# Altium PCB RF315.PcbDoc (part 1 of 3)
Units mm, origin at the board's own origin, x right, y up, seen from the top; angles counter-clockwise.
Board outline 104 x 96 mm, 2 copper layers (Top Layer, Bottom Layer); 249 components, 20 nets, 1048 pads, 153 vias.
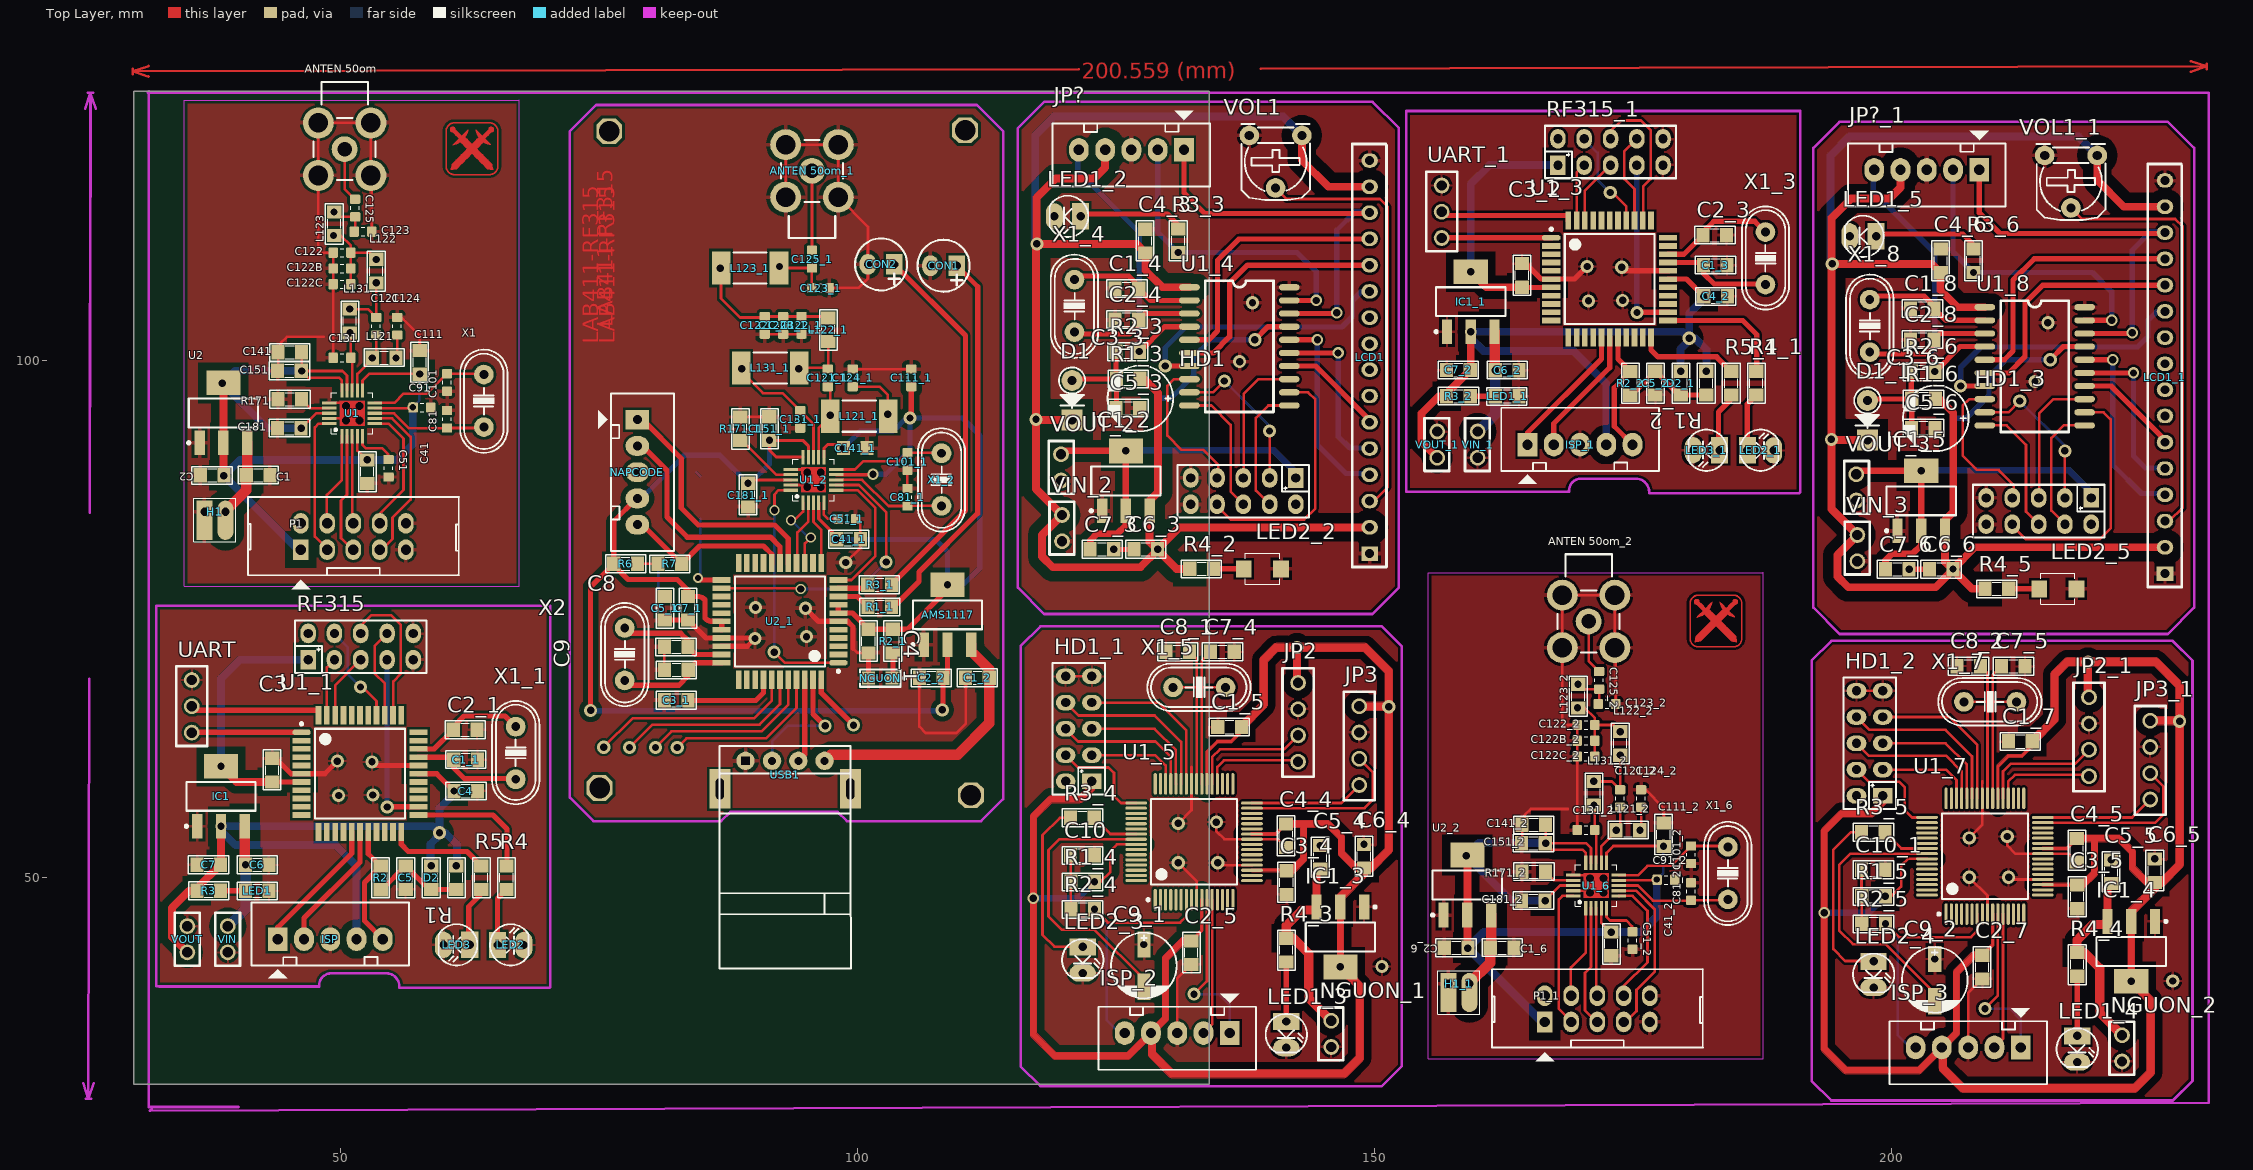
[diagram p0: Top Layer view]
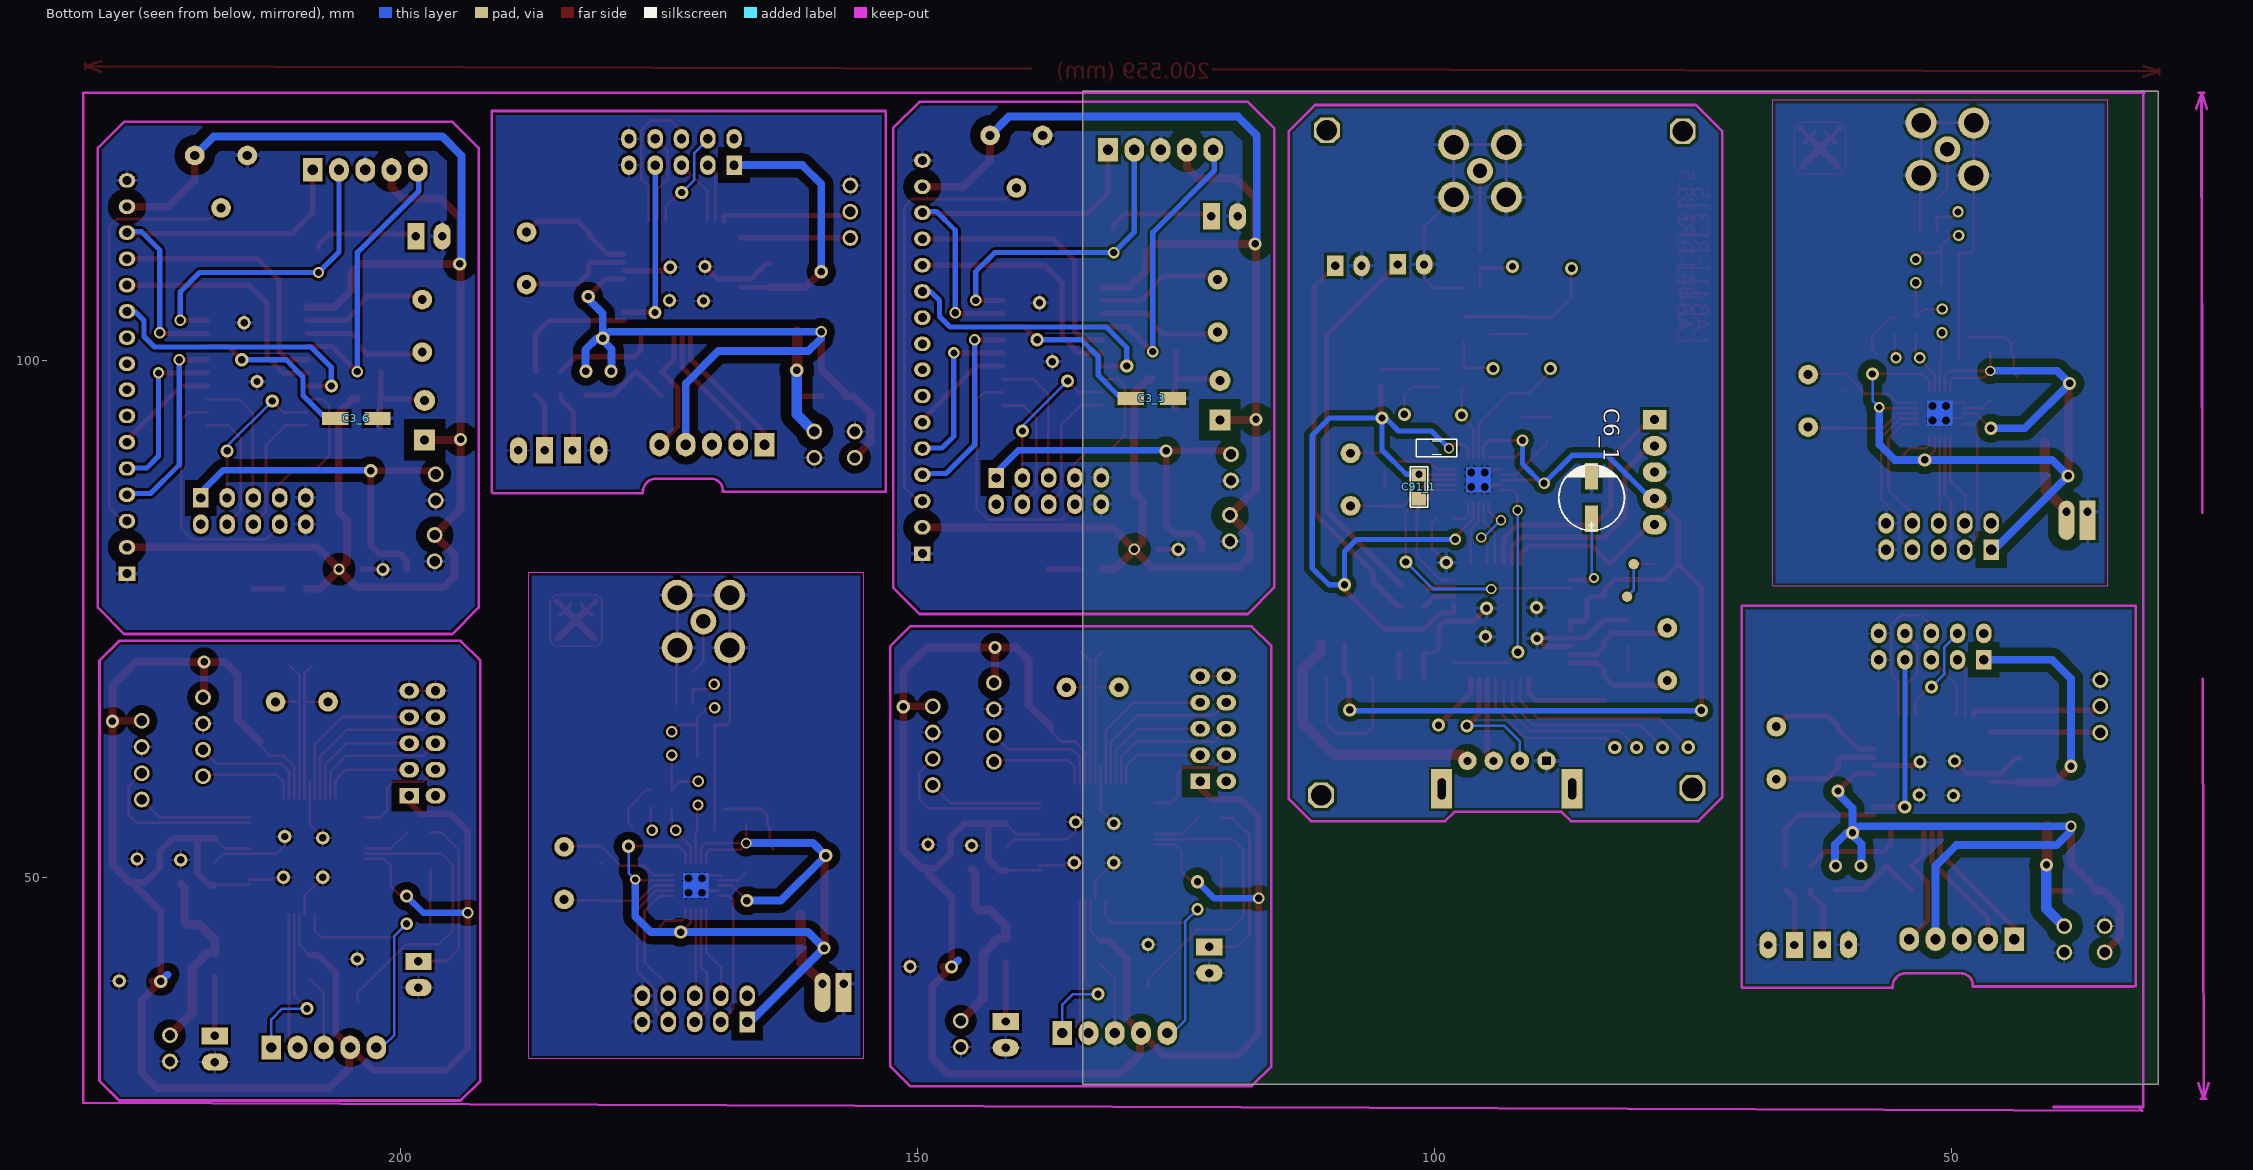
[diagram p1: Bottom Layer view, seen from below]

## Layer stack, top to bottom
Top Layer: signal copper 0.0356
Dielectric: dielectric 0.32, FR-4, Dk 4.8
Bottom Layer: signal copper 0.0356

## Board outline
30,30 30,126 134,126 134,30

## Design rules (kind name [scope] priority, off if disabled: settings)
Clearance 5 [InNet('+5V')] p1: gap=1.016
Clearance 3.3 [InNet('+3.3V')] p2: gap=0.762
Clearance [All] p3: gap=0.254
ComponentClearance [All] p1: gap=0.051 collisioncheckmode=3 verticalgap=0.051 showdistances=FALSE
PolygonConnect [All] p1: connectstyle=Relief reliefconductorwidth=0.381 reliefentries=4 polygonreliefangle="90 Angle" airgapwidth=0.254
RoutingVias [All] p1: holewidth=0.711 width=1.27 viastyle="Through Hole" minholewidth=0.711 minwidth=1.27 maxholewidth=0.711 maxwidth=1.27
ShortCircuit [All] p1: allowed=TRUE
SilkToSilkClearance [All] p1: silktosilkclearance=0.051
SilkToSolderMaskClearance [IsPad] p1: minsilkscreentomaskgap=0 clearancetoexposedcopper=TRUE
SolderMaskExpansion [All] p1: expansion=0.102
Width 5v [InNet('+5V')] p1: maxlimit=1.016 minlimit=1.016 preferedwidth=1.016
Width 3.3v [InNet('+3.3V')] p2: maxlimit=0.254 minlimit=0.254 preferedwidth=0.254
Width [All] p3: maxlimit=0.254 minlimit=0.254 preferedwidth=0.254
24 further rules are at their usual default settings.

## Components (designator, comment, footprint, x,y, rotation, side; value= is the part's Value field where it differs from the comment)
AMS1117 "LM317" SOT223-4N 108.687,75.387 r90 top
"ANTEN 50om" "Header 2" MCX5.08-H5 50.383,126.912 r270 top
"ANTEN 50om_1" "Header 2" MCX5.08-H5 95.58,111.811 r90 top (schematic designator "ANTEN 50om")
"ANTEN 50om_2" "Header 2" MCX5.08-H5 170.677,81.243 r270 top (schematic designator "ANTEN 50om")
C1 "104" SM-0805#1 42.012,88.875 r180 top
C1_1 "103" SM-0805#1 62.078,61.366 r180 top (schematic designator C1)
C1_2 "104" SM-0805#1 111.582,69.317 r0 top (schematic designator C1)
C1_3 "103" SM-0805#1 182.931,109.195 r180 top (schematic designator C1)
C1_4 "103" SM-0805#1 126.035,106.934 r180 top (schematic designator C1)
C1_5 "103" SM-0805#1 135.954,64.536 r0 top (schematic designator C1)
C1_6 "104" SM-0805#1 162.306,43.205 r180 top (schematic designator C1)
C1_7 "103" SM-0805#1 212.434,63.139 r0 top (schematic designator C1)
C1_8 "103" SM-0805#1 202.946,105.004 r180 top (schematic designator C1)
C2 "104" SM-0805#1 37.567,88.875 r0 top
C2_1 "103" SM-0805#1 62.027,64.262 r180 top (schematic designator C2)
C2_2 "104" SM-0805#1 107.112,69.291 r0 top (schematic designator C2)
C2_3 "103" SM-0805#1 182.88,112.09 r180 top (schematic designator C2)
C2_4 "103" SM-0805#1 126.035,103.937 r180 top (schematic designator C2)
C2_5 "103" SM-0805#1 132.271,42.717 r270 top (schematic designator C2)
C2_6 "104" SM-0805#1 157.861,43.205 r0 top (schematic designator C2)
C2_7 "103" SM-0805#1 208.751,41.32 r270 top (schematic designator C2)
C2_8 "103" SM-0805#1 202.946,102.006 r180 top (schematic designator C2)
C3 "103" SM-0805#1 43.383,60.376 r270 top
C3_1 "103" SM-0805#1 82.448,67.107 r180 top (schematic designator C3)
C3_2 "103" SM-0805#1 164.236,108.204 r270 top (schematic designator C3)
C3_3 "100uF/35V" CP1/2.5_SM#1 128.6,96.317 r180 top (schematic designator C3)
C3_4 "103" SM-0805#1 141.466,49.499 r270 top (schematic designator C3)
C3_5 "103" SM-0805#1 217.945,48.102 r270 top (schematic designator C3)
C3_6 "100uF/35V" CP1/2.5_SM#1 205.511,94.386 r180 top (schematic designator C3)
C4 "103" SM-0805#1 62.103,58.344 r180 top
C4_1 "103" SM-0805#1 101.041,72.847 r270 top (schematic designator C4)
C4_2 "103" SM-0805#1 182.956,106.172 r180 top (schematic designator C4)
C4_3 "103" SM-0805#1 127.813,111.531 r270 top (schematic designator C4)
C4_4 "103" SM-0805#1 141.415,54.02 r90 top (schematic designator C4)
C4_5 "103" SM-0805#1 217.895,52.623 r90 top (schematic designator C4)
C4_6 "103" SM-0805#1 204.724,109.601 r270 top (schematic designator C4)
C5 "103" SM-0805#1 56.286,49.962 r90 top
C5_1 "103" SM-0805#1 81.356,76.022 r90 top (schematic designator C5)
C5_2 "103" SM-0805#1 177.14,97.79 r90 top (schematic designator C5)
C5_3 "103" SM-0805#1 126.136,95.377 r180 top (schematic designator C5)
C5_4 "103" SM-0805#1 144.743,51.938 r270 top (schematic designator C5)
C5_5 "103" SM-0805#1 221.222,50.541 r270 top (schematic designator C5)
C5_6 "103" SM-0805#1 203.048,93.447 r180 top (schematic designator C5)
C6 "103" SM-0805#1 41.935,51.206 r180 top
C6_1 "100uF/35V" CP1/2.5_SM#2 84.785,85.446 r90 bottom (schematic designator C6)
C6_2 "103" SM-0805#1 162.789,99.035 r180 top (schematic designator C6)
C6_3 "103" SM-0805#1 127.864,81.737 r0 top (schematic designator C6)
C6_4 "103" SM-0805#1 148.959,52.039 r270 top (schematic designator C6)
C6_5 "103" SM-0805#1 225.438,50.642 r270 top (schematic designator C6)
C6_6 "103" SM-0805#1 204.775,79.807 r0 top (schematic designator C6)
C7 "103" SM-0805#1 37.236,51.232 r0 top
C7_1 "103" SM-0805#1 83.591,76.022 r90 top (schematic designator C7)
C7_2 "103" SM-0805#1 158.09,99.06 r0 top (schematic designator C7)
C7_3 "103" SM-0805#1 123.622,81.712 r180 top (schematic designator C7)
C7_4 "103" SM-0805#1 135.268,71.8 r180 top (schematic designator C7)
C7_5 "103" SM-0805#1 211.748,70.403 r180 top (schematic designator C7)
C7_6 "103" SM-0805#1 200.533,79.781 r180 top (schematic designator C7)
C8 "33pF" SM-0805#1 82.474,70.079 r0 top
C8_1 "103" SM-0805#1 130.95,71.826 r0 top (schematic designator C8)
C8_2 "103" SM-0805#1 207.43,70.429 r0 top (schematic designator C8)
C9 "33pF" SM-0805#1 82.448,72.288 r0 top
C9_1 "103" CP1/2.5_SM#2 127.674,42.743 r270 top (schematic designator C9)
C9_2 "103" CP1/2.5_SM#2 204.153,41.346 r270 top (schematic designator C9)
C10 "103" SM-0805#1 121.73,52.115 r180 top
C10_1 "103" SM-0805#1 198.21,50.718 r180 top (schematic designator C10)
C41 "104" SM-0805#1 52.578,89.23 r90 top
C41_1 "104" SM-0805#1 99.111,82.677 r180 top (schematic designator C41)
C41_2 "104" SM-0805#1 172.872,43.561 r90 top (schematic designator C41)
C51 "104" 0603ESDA#1 54.635,89.56 r90 top
C51_1 "104" 0603ESDA#2 98.958,84.658 r180 top (schematic designator C51)
C51_2 "104" 0603ESDA#1 174.93,43.891 r90 top (schematic designator C51)
C81 "27pF" 0603ESDA#1 60.289,94.299 r270 top
C81_1 "27pF" 0603ESDA#2 104.808,86.756 r270 top (schematic designator C81)
C81_2 "27pF" 0603ESDA#1 180.583,48.629 r270 top (schematic designator C81)
C91 "103" 0603ESDA#2 57.861,95.428 r180 top
C91_1 "103" SM-0805#1 101.498,87.757 r90 bottom (schematic designator C91)
C91_2 "103" 0603ESDA#2 178.156,49.759 r180 top (schematic designator C91)
C101 "27pF" 0603ESDA#1 60.289,97.855 r90 top
C101_1 "27pF" 0603ESDA#2 104.808,90.21 r90 top (schematic designator C101)
C101_2 "27pF" 0603ESDA#1 180.583,52.185 r90 top (schematic designator C101)
C111 "220pF" SM-0805#1 57.633,99.797 r270 top
C111_1 "220pF" 0603ESDA#2 105.181,98.298 r270 top (schematic designator C111)
C111_2 "220pF" SM-0805#1 177.927,54.127 r270 top (schematic designator C111)
C121 "6.8pF" 0603ESDA#1 53.431,103.29 r270 top
C121_1 "6.8pF" 0603ESDA#2 97.104,98.298 r270 top (schematic designator C121)
C121_2 "6.8pF" 0603ESDA#1 173.725,57.621 r270 top (schematic designator C121)
C122 "12pF" 0603ESDA#1 50.129,110.402 r180 top
C122_1 "12pF" 0603ESDA#2 94.564,103.378 r270 top (schematic designator C122)
C122_2 "12pF" 0603ESDA#1 170.423,64.733 r180 top (schematic designator C122)
C122B "12pF" 0603ESDA#1 50.129,108.878 r180 top
C122B_1 "12pF" 0603ESDA#2 92.786,103.378 r270 top (schematic designator C122B)
C122B_2 "12pF" 0603ESDA#1 170.423,63.209 r180 top (schematic designator C122B)
C122C "12pF" 0603ESDA#1 50.129,107.354 r180 top
C122C_1 "12pF" 0603ESDA#2 91.008,103.378 r270 top (schematic designator C122C)
C122C_2 "12pF" 0603ESDA#1 170.423,61.685 r180 top (schematic designator C122C)
C123 "6.8pF" 0603ESDA#1 52.161,112.434 r0 top
C123_1 "6.8pF" 0603ESDA#2 96.418,106.985 r0 top (schematic designator C123)
C123_2 "6.8pF" 0603ESDA#1 172.455,66.765 r0 top (schematic designator C123)
C124 "220pF" 0603ESDA#1 55.463,103.29 r270 top
C124_1 "220pF" 0603ESDA#2 99.517,98.298 r270 top (schematic designator C124)
C124_2 "220pF" 0603ESDA#1 175.757,57.621 r270 top (schematic designator C124)
C125 "220pF" 0603ESDA#1 51.399,114.72 r90 top
C125_1 "220pF" 0603ESDA#2 95.58,109.779 r90 top (schematic designator C125)
C125_2 "220pF" 0603ESDA#1 171.693,69.051 r90 top (schematic designator C125)
C131 "6.8pF" 0603ESDA#1 50.129,100.242 r180 top
C131_1 "27" 0603ESDA#2 94.437,94.285 r270 top (schematic designator C131)
C131_2 "6.8pF" 0603ESDA#1 170.423,54.573 r180 top (schematic designator C131)
C141 "103" SM-0805#1 45.085,100.762 r0 top
C141_1 "103" SM-0805#2 99.771,91.516 r180 bottom (schematic designator C141)
C141_2 "103" SM-0805#1 165.379,55.093 r0 top (schematic designator C141)
C151 "220pF" SM-0805#1 45.049,98.972 r180 top
C151_1 "220pF" SM-0805#1 91.465,93.396 r90 top (schematic designator C151)
C151_2 "220pF" SM-0805#1 165.343,53.303 r180 top (schematic designator C151)
C181 "220pF" SM-0805#1 45.034,93.421 r180 top
C181_1 "27pF" SM-0805#1 89.408,86.97 r270 top (schematic designator C181)
C181_2 "220pF" SM-0805#1 165.329,47.752 r180 top (schematic designator C181)
CON1 "LED" LED3mm 108.306,109.144 r180 top
CON2 "LED" LED3mm 102.26,109.271 r180 top
D1 "1N4007" D1AN 120.726,96.139 r90 top
D1_1 "1N4007" D1AN 197.637,94.209 r90 top (schematic designator D1)
D2 "1N4007" SM-0805#1 58.75,49.962 r90 top
D2_1 "1N4007" SM-0805#1 179.603,97.79 r90 top (schematic designator D2)
H1 "Header 2" HDR1X2 36.576,85.369 r0 top
H1_1 "Header 2" HDR1X2 156.87,39.7 r0 top (schematic designator H1)
HD1 "Header 5x2" HED2X5_cen 142.367,88.621 r180 top
HD1_1 "Header 5x2" HED2X5_CEN 122.645,59.278 r90 top (schematic designator HD1)
HD1_2 "Header 5x2" HED2X5_CEN 199.124,57.881 r90 top (schematic designator HD1)
HD1_3 "Header 5x2" HED2X5_cen 219.278,86.69 r180 top (schematic designator HD1)
IC1 "LM1117" SOT223-4N 38.43,57.836 r90 top
IC1_1 "LM1117" SOT223-4N 159.283,105.664 r90 top (schematic designator IC1)
IC1_2 "LM1117" SOT223-4N 125.933,88.341 r90 top (schematic designator IC1)
IC1_3 "LM1117" SOT223-4N 146.673,44.241 r270 top (schematic designator IC1)
IC1_4 "LM1117" SOT223-4N 223.152,42.844 r270 top (schematic designator IC1)
IC1_5 "LM1117" SOT223-4N 202.844,86.411 r90 top (schematic designator IC1)
ISP "JP5" CON5#1 43.917,44.018 r0 top
ISP_1 "JP5" CON5#1 164.77,91.846 r0 top (schematic designator ISP)
ISP_2 "JP5" CON5#1 135.98,34.945 r180 top (schematic designator ISP)
ISP_3 "JP5" CON5#1 212.459,33.548 r180 top (schematic designator ISP)
JP2 "JP4" CON4 142.584,63.723 r90 top
JP2_1 "JP4" CON4 219.063,62.326 r90 top (schematic designator JP2)
JP3 "JP4" CON4 148.502,61.463 r90 top
JP3_1 "JP4" CON4 224.981,60.066 r90 top (schematic designator JP3)
JP? "JP5" CON5#1 131.547,120.345 r180 top
JP?_1 "JP5" CON5#1 208.458,118.415 r180 top (schematic designator JP?)
L121 "33nH" SM-0805#1 54.193,100.242 r180 top
L121_1 "27nH" SM-2512 100.152,94.59 r180 top (schematic designator L121)
L121_2 "33nH" SM-0805#1 174.487,54.573 r180 top (schematic designator L121)
L122 "18nH" SM-0805#1 53.431,108.624 r90 top
L122_1 "22nH" SM-0805#1 97.155,102.946 r90 top (schematic designator L122)
L122_2 "18nH" SM-0805#1 173.725,62.955 r90 top (schematic designator L122)
L123 "33nH" SM-0805#1 49.367,113.196 r90 top
L123_1 "27nH" SM-2512 89.586,108.915 r0 top (schematic designator L123)
L123_2 "33nH" SM-0805#1 169.661,67.527 r90 top (schematic designator L123)
L131 "33nH" SM-0805#1 50.891,103.798 r90 top
L131_1 "27nH" SM-2512 91.542,99.263 r0 top (schematic designator L131)
L131_2 "33nH" SM-0805#1 171.185,58.129 r90 top (schematic designator L131)
LCD1 "LCD16x2A" LCD 149.504,81.305 r90 top
LCD1_1 "LCD16x2A" LCD 226.416,79.375 r90 top (schematic designator LCD1)
LED1 "LED" SM-0805#1 41.935,48.692 r0 top
LED1_1 "LED" SM-0805#1 162.789,96.52 r0 top (schematic designator LED1)
LED1_2 "LED" LED-3 121.564,113.919 r180 top (schematic designator LED1)
LED1_3 "LED" LED-3 141.441,36.063 r270 top (schematic designator LED1)
LED1_4 "LED" LED-3 217.92,34.666 r270 top (schematic designator LED1)
LED1_5 "LED" LED-3 198.476,111.989 r180 top (schematic designator LED1)
LED2 "LED" LED-3 65.176,43.459 r0 top
LED2_1 "LED" LED-3 186.03,91.288 r0 top (schematic designator LED2)
LED2_2 "LED" SM-LED-GEEN 139.141,79.832 r0 top (schematic designator LED2)
LED2_3 "LED" LED-3 121.756,43.276 r270 top (schematic designator LED2)
LED2_4 "LED" LED-3 198.235,41.879 r270 top (schematic designator LED2)
LED2_5 "LED" SM-LED-GEEN 216.052,77.902 r0 top (schematic designator LED2)
LED3 "LED" LED-3 62.484,43.477 r180 top
LED3_1 "LED" LED-3 183.337,91.305 r180 top (schematic designator LED3)
NAPCODE "JP5" CON5#2 78.689,94.259 r270 top
NGUON "LED" LED0805 102.184,69.266 r180 top
NGUON_1 "JP2" CON2 145.784,34.894 r90 top (schematic designator NGUON)
NGUON_2 "JP2" CON2 222.263,33.497 r90 top (schematic designator NGUON)
P1 "Header 6" Hed2X5 46.152,81.686 r0 top
P1_1 "Header 6" Hed2X5 166.446,36.017 r0 top (schematic designator P1)
R1 "1k" SM-0805#1 61.189,49.962 r90 top
R1_1 "220" SM-0805#1 102.133,76.149 r0 top (schematic designator R1)
R1_2 "1k" SM-0805#1 182.042,97.79 r90 top (schematic designator R1)
R1_3 "1k" SM-0805#1 126.162,98.196 r0 top (schematic designator R1)
R1_4 "1k" SM-0805#1 121.756,49.575 r0 top (schematic designator R1)
R1_5 "1k" SM-0805#1 198.235,48.178 r0 top (schematic designator R1)
R1_6 "1k" SM-0805#1 203.073,96.266 r0 top (schematic designator R1)
R2 "1k" SM-0805#1 53.873,49.936 r270 top
R2_1 "220" SM-0805#1 103.403,72.847 r270 top (schematic designator R2)
R2_2 "1k" SM-0805#1 174.727,97.765 r270 top (schematic designator R2)
R2_3 "1k" SM-0805#1 126.111,100.813 r180 top (schematic designator R2)
R2_4 "1k" SM-0805#1 121.756,46.908 r0 top (schematic designator R2)
R2_5 "1k" SM-0805#1 198.235,45.511 r0 top (schematic designator R2)
R2_6 "1k" SM-0805#1 203.022,98.882 r180 top (schematic designator R2)
R3 "1k" SM-0805#1 37.236,48.692 r180 top
R3_1 "220" SM-0805#1 102.108,78.308 r0 top (schematic designator R3)
R3_2 "1k" SM-0805#1 158.09,96.52 r180 top (schematic designator R3)
R3_3 "1k" SM-0805#1 130.988,111.557 r90 top (schematic designator R3)
R3_4 "1k" SM-0805#1 121.73,55.748 r180 top (schematic designator R3)
R3_5 "1k" SM-0805#1 198.21,54.351 r180 top (schematic designator R3)
R3_6 "1k" SM-0805#1 207.899,109.626 r90 top (schematic designator R3)
R4 "1k" SM-0805#1 66.04,49.962 r90 top
R4_1 "1k" SM-0805#1 186.893,97.79 r90 top (schematic designator R4)
R4_2 "1k" SM-0805#1 133.248,79.832 r0 top (schematic designator R4)
R4_3 "1k" SM-0805#1 141.441,42.971 r90 top (schematic designator R4)
R4_4 "1k" SM-0805#1 217.92,41.574 r90 top (schematic designator R4)
R4_5 "1k" SM-0805#1 210.16,77.902 r0 top (schematic designator R4)
R5 "1k" SM-0805#1 63.602,49.962 r90 top
R5_1 "1k" SM-0805#1 184.455,97.79 r90 top (schematic designator R5)
R6 "1k" SM-0805#1 77.546,80.315 r180 top
R7 "1k" SM-0805#1 81.839,80.315 r0 top
R171 "56K" SM-0805#1 45.085,96.215 r180 top
R171_1 "56K" SM-0805#1 88.646,93.37 r90 top (schematic designator R171)
R171_2 "56K" SM-0805#1 165.379,50.546 r180 top (schematic designator R171)
RF315 "Header 5x2" HED2X5_cen 46.863,71.044 r0 top
RF315_1 "Header 5x2" HED2X5_cen 167.716,118.872 r0 top (schematic designator RF315)
U1 "CC1101" QFN-20Pin 49.113,92.876 r90 top
U1_1 "PIC18F46K20T-I/PT" TQFP-PT44_N 51.867,60.02 r0 top (schematic designator U1)
U1_2 "CC1101" QFN-20Pin 93.726,86.436 r90 top (schematic designator U1)
U1_3 "PIC18F46K20T-I/PT" TQFP-PT44_N 172.72,107.848 r0 top (schematic designator U1)
U1_4 "PIC18F14K50-I/P" SOP-20 132.08,107.061 r0 top (schematic designator U1)
U1_5 "PIC24FJ128GA106T-I/PT" TQFP-PT64_M 132.525,53.436 r90 top (schematic designator U1)
U1_6 "CC1101" QFN-20Pin 169.407,47.207 r90 top (schematic designator U1)
U1_7 "PIC24FJ128GA106T-I/PT" TQFP-PT64_M 209.005,52.039 r90 top (schematic designator U1)
U1_8 "PIC18F14K50-I/P" SOP-20 208.991,105.131 r0 top (schematic designator U1)
U2 "LM1117" SOT223-4N 38.659,94.92 r90 top
U2_1 "PIC18F45J50-I/ML" PIC18F45J50SMD 92.481,74.752 r180 top (schematic designator U2)
U2_2 "LM1117" SOT223-4N 158.953,49.251 r90 top (schematic designator U2)
UART "JP3" CON3 35.611,66.497 r90 top
UART_1 "JP3" CON3 156.464,114.325 r90 top (schematic designator UART)
USB1 "USB-S" USB-A 96.799,61.265 r180 top
VIN "JP2" CON2 39.091,44.044 r90 top
VIN_1 "JP2" CON2 159.944,91.872 r90 top (schematic designator VIN)
VIN_2 "JP2" CON2 119.761,83.795 r90 top (schematic designator VIN)
VIN_3 "JP2" CON2 196.672,81.864 r90 top (schematic designator VIN)
VOL1 "50K" VR 142.951,121.742 r180 top
VOL1_1 "50K" VR 219.862,119.812 r180 top (schematic designator VOL1)
VOUT "JP2" CON2 35.179,44.044 r90 top
VOUT_1 "JP2" CON2 156.032,91.872 r90 top (schematic designator VOUT)
VOUT_2 "JP2" CON2 119.659,89.611 r270 top (schematic designator VOUT)
VOUT_3 "JP2" CON2 196.571,87.681 r270 top (schematic designator VOUT)
X1 "26Mhz" XT2 63.845,96.077 r90 top
X1_1 "4Mhz" XT2 66.929,62.027 r270 top (schematic designator X1)
X1_2 "26Mhz" XT2 108.102,88.468 r90 top (schematic designator X1)
X1_3 "4Mhz" XT2 187.782,109.855 r270 top (schematic designator X1)
X1_4 "4Mhz" XT2 120.955,105.258 r90 top (schematic designator X1)
X1_5 "32,768 Khz" XT2 133.033,68.371 r0 top (schematic designator X1)
X1_6 "26Mhz" XT2 184.139,50.407 r90 top (schematic designator X1)
X1_7 "32,768 Khz" XT2 209.513,66.974 r0 top (schematic designator X1)
X1_8 "4Mhz" XT2 197.866,103.327 r90 top (schematic designator X1)
X2 "20Mhz" XT2 77.47,71.577 r90 top

## Footprints (in the part's own frame and the unit in brackets; to place one, negate y for a bottom-side part, rotate by r counter-clockwise, add the part's x,y. Pads: shape width x height; smd on the part's side, far side on the other; paste and mask are expansions set on the pad)
0603ESDA#1 [mm] "Chip ESD suppressor, Body 1.6x0.8mm, 0603, IPC Medium Density"
  round 0.254 on Mech14: 0(0,0)
  rrect25% 0.9x1 smd: 1(-0.85,0) 2(0.85,0)
  Top Layer pour cut-out: -0.4,0.6 0.4,0.6 0.4,-0.6 -0.4,-0.6
  silkscreen extent -0.15,-0.41 0.15,0.41, body extent -0.85,-0.45 0.85,0.45, height 0.79
0603ESDA#2 [mm] "Chip ESD suppressor, Body 1.6x0.8mm, 0603, IPC Medium Density"
  round 0.254 on Mech15: 0(0,0)
  rrect25% 0.9x1 smd: 1(-0.85,0) 2(0.85,0)
  Top Layer pour cut-out: -0.65,0.5 -0.45,0.7 0.45,0.7 0.65,0.5 0.65,-0.5 0.45,-0.7 -0.45,-0.7 -0.65,-0.5
  silkscreen extent -0.15,-0.41 0.15,0.41, body extent -0.85,-0.45 0.85,0.45, height 0.79
CON2 [mm] "2-Pin Connector; pitch 2.54mm"
  round 1.524 hole 1: 1(-1.3,0) 2(1.24,0)
  silkscreen extent -2.58,-1.18 2.52,1.22
CON3 [mm] "3-Pin Connector; pitch 2.54mm"
  round 1.524 hole 1: 1(-2.5,0) 2(0.04,0) 3(2.58,0)
  silkscreen extent -3.8,-1.5 3.9,1.5
CON4 [mil] "4-Pin Connector; pitch 2.54mm"
  round 60 hole 39.37: 1(-100,0) 2(0,0) 3(100,0) 4(200,0)
  silkscreen extent -157,-59 256,59
CON5#1 [mm] "CON5"
  rect 1.905x2.286 hole 1: 1(0,0)
  oval 1.905x2.286 hole 1: 2(2.54,0) 3(5.08,0) 4(7.62,0) 5(10.16,0)
  silkscreen extent -2.54,-3.8 12.7,3.56, body extent -2.63,-2.7 12.83,3.7, height 7
CON5#2 [mm] "CON5"
  rect 1.905x2.286 hole 0.864: 1(0,0)
  oval 1.905x2.286 hole 0.864: 2(2.54,0) 3(5.08,0) 4(7.62,0) 5(10.16,0)
  silkscreen extent -2.54,-3.8 12.7,3.56
CP1/2.5_SM#1 [mil] "Tu hoa SMD 33 >100 uF,50V, 220uF/16V,25V"
  rect 100x50 smd far side: 1(-30,0) 2(131,0)
  silkscreen extent -75,-125 175,125
CP1/2.5_SM#2 [mil] "Tu hoa SMD 33 >100 uF,50V, 220uF/16V,25V"
  rect 100x50 smd: 1(-30,0) 2(131,0)
  silkscreen extent -75,-125 175,125
D1AN [mil] "Diode 1A, W 100mil, L 150mil"
  round 80 hole 35: 1(75,0)
  rect 80x80 hole 35: 2(-75,0)
  silkscreen extent -30,-50 125,50, body extent -64,-50 104,55, height 252
HDR1X2 [mil] "Connector; Header; 2 Position"
  rect 60x150 hole 32 copper offset 0,-33: 1(10,0)
  oval 60x150 hole 32 copper offset 0,-33: 2(90,0)
  silkscreen extent -30,-115 130,50
Hed2X5 [mm] "Header 10x2,20 pin, connecter"
  rect 1.5x2 hole 1: 1(0,0)
  oval 1.5x2 hole 1: 2(0,2.54) 3(2.54,0) 4(2.54,2.54) 5(5.08,0) 6(5.08,2.54) 7(7.62,0) 8(7.62,2.54) 9(10.16,0) 10(10.16,2.54)
  silkscreen extent -5.1,-3.81 15.29,5.11
HED2X5_cen [mm] "Connector; Header; 5x2 Position"
  rect 1.5x1.9 hole 0.9: 1(0,0)
  oval 1.5x1.9 hole 0.9: 2(2.54,0) 3(5.08,0) 4(7.62,0) 5(10.16,0) 6(0,2.54) 7(2.54,2.54) 8(5.08,2.54) 9(7.62,2.54) 10(10.16,2.54)
  silkscreen extent -1.27,-1.27 11.43,3.81, body extent -1.24,-10.02 11.46,2.86, height 5.02
HED2X5_CEN [mm] "Connector; Header; 5x2 Position"
  rect 1.5x1.9 hole 0.9: 1(0,0)
  oval 1.5x1.9 hole 0.9: 2(2.54,0) 3(5.08,0) 4(7.62,0) 5(10.16,0) 6(0,2.54) 7(2.54,2.54) 8(5.08,2.54) 9(7.62,2.54) 10(10.16,2.54)
  silkscreen extent -1.27,-1.27 11.43,3.81, body extent -1.24,-10.02 11.46,2.86, height 5.02
LCD [mm]
  rect 1.4x1.6 hole 0.85 mask+0: 1(0,0)
  oval 1.4x1.6 hole 0.85 mask+0: 2(2.54,0) 3(5.08,0) 4(7.62,0) 5(10.16,0) 6(12.7,0) 7(15.24,0) 8(17.78,0) 9(20.28,0) 10(22.82,0) 11(25.351,0) 12(27.891,0) 13(30.431,0) 14(32.971,0) 15(35.471,0) 16(38.011,0)
  silkscreen extent -1.3,-1.63 39.61,1.67
LED3mm [mm]
  rect 1.6x2 hole 0.8: 1(-1.27,0)
  oval 1.6x2 hole 0.8: 2(1.27,0)
  silkscreen extent -2.52,-2.51 2.51,2.52, body extent -1.99,-1.5 1.99,1.99, height 5.38
LED0805 [mil] "Chip Resistor; Body 2.0 x 1.3 mm (LxW typ)"
  rect 50x50 smd: 1(-45,0) 2(45,0)
  silkscreen extent -97,-33 77,33, body extent -60,-25 60,25, height 47
LED-3 [mil] "LED 2 PIN, 3ly Only colour"
  rect 65x100 hole 32: 1(0,0)
  oval 65x100 hole 32: 2(100,0)
  silkscreen extent -29,-78 118,79, body extent -29,-75 109,75, height 256
MCX5.08-H5 [mm] "Chan anten"
  round 2.5 hole 1.4: 1(6.5,0)
  round 3 hole 1.9: 2(3.96,2.54) 2(3.96,-2.54) 2(9.04,-2.54) 2(9.04,2.54)
  silkscreen extent 0,-3 9.5,3
PIC18F45J50SMD [mm] "PIC18F45J50SMD"
  oct 1.75x0.55 smd: 1(-5.65,4)
  rect 1.75x0.55 smd: 2(-5.65,3.2) 3(-5.65,2.4) 4(-5.65,1.6) 5(-5.65,0.8) 6(-5.65,0) 7(-5.65,-0.8) 8(-5.65,-1.6) 9(-5.65,-2.4) 10(-5.65,-3.2) 11(-5.65,-4) 23(5.65,-4) 24(5.65,-3.2) 25(5.65,-2.4) 26(5.65,-1.6) 27(5.65,-0.8) 28(5.65,0) 29(5.65,0.8) 30(5.65,1.6) 31(5.65,2.4) 32(5.65,3.2) 33(5.65,4)
  rect 0.55x1.75 smd: 12(-4,-5.65) 13(-3.2,-5.65) 14(-2.4,-5.65) 15(-1.6,-5.65) 16(-0.8,-5.65) 17(0,-5.65) 18(0.8,-5.65) 19(1.6,-5.65) 20(2.4,-5.65) 21(3.2,-5.65) 22(4,-5.65) 34(4,5.65) 35(3.2,5.65) 36(2.4,5.65) 37(1.6,5.65) 38(0.8,5.65) 39(0,5.65) 40(-0.8,5.65) 41(-1.6,5.65) 42(-2.4,5.65) 43(-3.2,5.65) 44(-4,5.65)
  silkscreen extent -5.77,-4.35 4.35,4.95, body extent -5,-5 5,5, height 1.2
QFN-20Pin [mm] "QFN 20pin 4x4mm"
  rect 1.4x0.3 smd paste+0.1 mask+0.1: 1(-0.2,-1) 2(-0.2,-1.5) 3(-0.2,-2) 4(-0.2,-2.5) 5(-0.2,-3) 11(4.2,-3) 12(4.2,-2.5) 13(4.2,-2) 14(4.2,-1.5) 15(4.2,-1)
  rect 0.3x1.4 smd paste+0.1 mask+0.1: 6(1,-4.2) 7(1.5,-4.2) 8(2,-4.2) 9(2.5,-4.2) 10(3,-4.2) 16(3,0.2) 17(2.5,0.2) 18(2,0.2) 19(1.5,0.2) 20(1,0.2)
  round 0 hole 0.762: 21(1.3,-1.4) 21(1.3,-2.7) 21(2.7,-2.7) 21(2.7,-1.4)
  Top Layer region: 0.8,-0.8 3.2,-0.8 3.2,-3.2 0.8,-3.2
  Bottom Layer region: 0.8,-0.8 3.2,-0.8 3.2,-3.2 0.8,-3.2
  Top Overlay keep-out circle w0.254: c0.4,-0.4 r0.1
  silkscreen extent 0,-4 4,0
SM-0805#1 [mil] "Compoment SMD 80x50mil"
  rect 50x55 smd: 1(-45,0) 2(45,0)
  silkscreen extent -77,-34 76,33, body extent -40,-27 40,23, height 24
SM-0805#2 [mil] "Compoment SMD 80x50mil"
  rect 50x55 smd far side: 1(-45,0) 2(45,0)
  silkscreen extent -77,-34 76,33, body extent -40,-27 40,23, height 24
SM-2512 [mm] "Chip Resistor; Body 6.3 x 3.2 mm (LxW typ) - C"
  rect 1.8x3.2 smd: 1(-2.8,0) 2(2.8,0)
  silkscreen extent -1.6,-1.5 1.6,1.5
SM-LED-GEEN [mil] "Compoment SMD 120x60mil"
  rect 60x65 smd: 1(-71,0) 2(71,0)
  silkscreen extent -65,-59 65,59, body extent -63,-32 63,31, height 44
SOP-20 [mm]
  oval 2x0.6 smd: 1(0,0) 2(0,-1.27) 3(0,-2.54) 4(0,-3.81) 5(0,-5.08) 6(0,-6.35) 7(0,-7.62) 8(0,-8.89) 9(0,-10.16) 10(0,-11.43) 11(9.652,-11.43) 12(9.652,-10.16) 13(9.652,-8.89) 14(9.652,-7.62) 15(9.652,-6.35) 16(9.652,-5.08) 17(9.652,-3.81) 18(9.652,-2.54) 19(9.652,-1.27) 20(9.652,0)
  silkscreen extent 1.52,-12.06 8.13,0.64
SOT223-4N [mm] "SOT223, 4-Leads, Body 6.5x3.5mm, Pitch 2.3mm, Lead Span 7mm, IPC Medium Density"
  rect 2.4x1 smd: 1(-2.9,2.3) 2(-2.9,0) 3(-2.9,-2.3)
  rect 2.4x3.3 smd: 4(2.9,0)
  silkscreen extent -3.02,-3.35 1.4,3.47, body extent -3.39,-3.27 3.5,3.23, height 1.72
TQFP-PT44_N [mm] "Thin QFP, 44-Leads, Body 10x10mm, Pitch 0.8mm, IPC Medium Density"
  oct 1.75x0.55 smd: 1(-5.65,4)
  rect 1.75x0.55 smd: 2(-5.65,3.2) 3(-5.65,2.4) 4(-5.65,1.6) 5(-5.65,0.8) 6(-5.65,0) 7(-5.65,-0.8) 8(-5.65,-1.6) 9(-5.65,-2.4) 10(-5.65,-3.2) 11(-5.65,-4) 23(5.65,-4) 24(5.65,-3.2) 25(5.65,-2.4) 26(5.65,-1.6) 27(5.65,-0.8) 28(5.65,0) 29(5.65,0.8) 30(5.65,1.6) 31(5.65,2.4) 32(5.65,3.2) 33(5.65,4)
  rect 0.55x1.75 smd: 12(-4,-5.65) 13(-3.2,-5.65) 14(-2.4,-5.65) 15(-1.6,-5.65) 16(-0.8,-5.65) 17(0,-5.65) 18(0.8,-5.65) 19(1.6,-5.65) 20(2.4,-5.65) 21(3.2,-5.65) 22(4,-5.65) 34(4,5.65) 35(3.2,5.65) 36(2.4,5.65) 37(1.6,5.65) 38(0.8,5.65) 39(0,5.65) 40(-0.8,5.65) 41(-1.6,5.65) 42(-2.4,5.65) 43(-3.2,5.65) 44(-4,5.65)
  silkscreen extent -5.77,-4.35 4.35,4.95, body extent -5,-5 5,5, height 1.2
TQFP-PT64_M [mm] "Thin QFP, 64-Leads, Body 10x10mm, Pitch 0.5mm, IPC Low Density"
  oval 2.1x0.3 smd: 1(-5.6,3.75) 2(-5.6,3.25) 3(-5.6,2.75) 4(-5.6,2.25) 5(-5.6,1.75) 6(-5.6,1.25) 7(-5.6,0.75) 8(-5.6,0.25) 9(-5.6,-0.25) 10(-5.6,-0.75) 11(-5.6,-1.25) 12(-5.6,-1.75) 13(-5.6,-2.25) 14(-5.6,-2.75) 15(-5.6,-3.25) 16(-5.6,-3.75) 33(5.6,-3.75) 34(5.6,-3.25) 35(5.6,-2.75) 36(5.6,-2.25) 37(5.6,-1.75) 38(5.6,-1.25) 39(5.6,-0.75) 40(5.6,-0.25) 41(5.6,0.25) 42(5.6,0.75) 43(5.6,1.25) 44(5.6,1.75) 45(5.6,2.25) 46(5.6,2.75) 47(5.6,3.25) 48(5.6,3.75)
  oval 0.3x2.1 smd: 17(-3.75,-5.6) 18(-3.25,-5.6) 19(-2.75,-5.6) 20(-2.25,-5.6) 21(-1.75,-5.6) 22(-1.25,-5.6) 23(-0.75,-5.6) 24(-0.25,-5.6) 25(0.25,-5.6) 26(0.75,-5.6) 27(1.25,-5.6) 28(1.75,-5.6) 29(2.25,-5.6) 30(2.75,-5.6) 31(3.25,-5.6) 32(3.75,-5.6) 49(3.75,5.6) 50(3.25,5.6) 51(2.75,5.6) 52(2.25,5.6) 53(1.75,5.6) 54(1.25,5.6) 55(0.75,5.6) 56(0.25,5.6) 57(-0.25,5.6) 58(-0.75,5.6) 59(-1.25,5.6) 60(-1.75,5.6) 61(-2.25,5.6) 62(-2.75,5.6) 63(-3.25,5.6) 64(-3.75,5.6)
  silkscreen extent -5.72,-4.15 4.15,4.57, body extent -5,-5 5,5, height 1.2
USB-A [mil]
  round 70 hole 31: 1(0,0) 2(100,0) 3(200,0)
  round 70 hole 31 square: 4(301,0)
  rect 80x150 hole 31 slot 80 at 90 deg: 5(-98,107) 6(399,107)
  silkscreen extent -101,-57 401,790, body extent -97,0 399,784, height 177
VR [mil] "Resistor Variable"
  round 75 hole 35: 1(0,0) 2(100,200) 3(200,0)
  silkscreen extent -31,-44 231,246, body extent -87,-30 307,372, height 165
XT2 [mil] "Footpin for Crystal 2 pin"
  round 75 hole 34: 1(-100,0) 2(100,0)
  silkscreen extent -198,-90 195,90, body extent -233,-93 213,90, height 138

## Part data
AMS1117: "Adj Voltage +1.2 -> +37V"
"ANTEN 50om" "ANTEN 50om_1" "ANTEN 50om_2" H1 H1_1: library part Hed2, "Header 2 (Green)"
C1 C1_2 C1_6 C2 C2_2 C2_6: library part Cap, "Capacitor"
C1_1 C1_3 C1_4 C1_5 C1_7 C1_8 C2_1 C2_3 C2_4 C2_5 C2_7 C2_8 C3 C3_1 C3_2 C3_4 C3_5 C4 C4_1 C4_2 C4_3 C4_4 C4_5 C4_6 C5 C5_1 C5_2 C5_3 C5_4 C5_5 C5_6 C6 C6_2 C6_3 C6_4 C6_5 C6_6 C7 C7_1 C7_2 C7_3 C7_4 C7_5 C7_6 C8_1 C8_2 C9_1 C9_2 C10 C10_1 C41 C41_1 C41_2 C51 C51_1 C51_2 C81 C81_1 C81_2 C91 C91_1 C91_2 C101 C101_1 C101_2 C111 C111_1 C111_2 C121 C121_1 C121_2 C122 C122_1 C122_2 C122B C122B_1 C122B_2 C122C C122C_1 C122C_2 C123 C123_1 C123_2 C124 C124_1 C124_2 C125 C125_1 C125_2 C131 C131_1 C131_2 C141 C141_1 C141_2 C151 C151_1 C151_2 C181 C181_1 C181_2: library part CM, "Cap SMD"
C3_3 C3_6 C6_1: library part CP3, "Cap 100uF/35V - 470uF/16V"
C8 C9: library part CN0, "Cremic For Xtal 1pF => 100pF"
CON1 CON2 LED1 LED1_1 LED1_3 LED1_4 LED2 LED2_1 LED2_3 LED2_4 LED3 LED3_1 NGUON: "LED Single colour Green and Red"
D1 D1_1 D2 D2_1: library part D1A, "Diode 1A"
HD1 HD1_1 HD1_2 HD1_3 RF315 RF315_1: library part HED5x2
IC1 IC1_1 IC1_2 IC1_3 IC1_4 IC1_5 U2 U2_2: "3v3"
ISP ISP_1 ISP_2 ISP_3 JP? JP?_1 NAPCODE: library part Con5, "Connector 5"
JP2 JP2_1 JP3 JP3_1: library part Con4, "Connector 4"
L121 L121_1 L121_2 L122 L122_1 L122_2 L123 L123_1 L123_2 L131 L131_1 L131_2: library part L1, "Inductor"
LCD1 LCD1_1: library part LCD16x2, "LCD dipslay 16 char, 2 line"
NGUON_1 NGUON_2 VIN VIN_1 VIN_2 VIN_3 VOUT VOUT_1 VOUT_2 VOUT_3: library part Con2, "Connector 2"
P1 P1_1: "Header, 6-Pin"
R1 R1_1 R1_2 R1_3 R1_4 R1_5 R1_6 R2 R2_1 R2_2 R2_3 R2_4 R2_5 R2_6 R3 R3_1 R3_2 R3_3 R3_4 R3_5 R3_6 R4 R4_1 R4_2 R4_3 R4_4 R4_5 R5 R5_1 R6 R7: library part R, "Resistor 1/4W"
R171 R171_1 R171_2: library part RM, "Resistor SMD"
U1 U1_2 U1_6: "Transceiver 315Mhz"
U1_1 U1_3: "Flash Microcontroller with 10-Bit A/D and nanoWatt Technology, 32K Flash, 44-Pin TQFP, Industrial Temperature Range, Tape and Reel"
U1_4 U1_8: "USB Flash Microcontroller with nanoWatt XLP Technology, 20-pin PDIP, Industrial Temperature"
U1_5 U1_7: "General Purpose 16-Bit Flash Microcontroller, 128KB Flash, 16KB SRAM, 64-Pin TQFP, Industrial Temperature, Tape and Reel"
U2_1: "Low Power, High Performance USB Microcontroller with nanoWatt XLP Technology, 44-pin QFN, Industrial Temperature"
UART UART_1: library part Con3, "Connector 3"
USB1: library part USB_S, "USB connector"
VOL1 VOL1_1: library part VOL-S, "Var Resistor"
X1 X1_1 X1_2 X1_3 X1_4 X1_6 X1_8 X2: library part XT2, "Crystal For all Crystal 2pin."
X1_5 X1_7: library part XT32k, "Crystal 32,768kHz for timer real"

## Free pads (board coordinates)
  oct 2.5x2.5 hole 2: 0(110.388,122.25) 1(75.971,122.149) 2(110.942,57.938) 3(75.042,58.638)
  round 1 all layers, no hole: 2(80.721,80.289) 3(81.356,77.14)

## Via types
v1: diameter 1.27, hole 0.711, Top Layer to Bottom Layer, 103 vias
v2: diameter 1.1, hole 0.7, Top Layer to Bottom Layer, 35 vias
v3: diameter 1, hole 0.7, Top Layer to Bottom Layer, 5 vias
v4: diameter 1, hole 0.6, Top Layer to Bottom Layer, 3 vias
v5: diameter 1.2, hole 0.7, Top Layer to Bottom Layer, 2 vias
v6: diameter 1.1, hole 0.711, Top Layer to Bottom Layer, 2 vias
v7: diameter 1, hole 0.711, Top Layer to Bottom Layer, 2 vias
v8: diameter 1.143, hole 0.711, Top Layer to Bottom Layer, 1 vias

## Nets (pads, with @x,y where several pads share a name; then routed paths per layer and width w, separated by ;. In a path a pad name is that pad's centre, name@x,y a point inside that pad or via, vN(x,y) a via of type N, cw(c..) or ccw(c..) an arc to the next point about the centre after c; other vN are vias at no path point)
+3.3V: 
+5V: 
CSN: 
GDO0: 
GDO2: 
GND: 
"NetANTEN 50om_1": 
NetC51_2: 
NetC81_2: 
NetC101_2: 
NetC121_1: 
NetC121_2: 
NetC122_1: 
NetC123_1: 
NetC124_2: 
NetC131_1: 
NetR171_1: 
SCK: 
SI: 
SO: 
pads on no net: "ANTEN 50om.1" "ANTEN 50om.2" "ANTEN 50om_1.1" "ANTEN 50om_1.2" "ANTEN 50om_2.1" "ANTEN 50om_2.2" AMS1117.1 AMS1117.2 AMS1117.3 AMS1117.4 C1.1 C1.2 C1_1.1 C1_1.2 C1_2.1 C1_2.2 C1_3.1 C1_3.2 C1_4.1 C1_4.2 C1_5.1 C1_5.2 C1_6.1 C1_6.2 C1_7.1 C1_7.2 C1_8.1 C1_8.2 C2.1 C2.2 C2_1.1 C2_1.2 C2_2.1 C2_2.2 C2_3.1 C2_3.2 C2_4.1 C2_4.2 C2_5.1 C2_5.2 C2_6.1 C2_6.2 C2_7.1 C2_7.2 C2_8.1 C2_8.2 C3.1 C3.2 C3_1.1 C3_1.2 C3_2.1 C3_2.2 C3_3.1 C3_3.2 C3_4.1 C3_4.2 C3_5.1 C3_5.2 C3_6.1 C3_6.2 C4.1 C4.2 C4_1.1 C4_1.2 C4_2.1 C4_2.2 C4_3.1 C4_3.2 C4_4.1 C4_4.2 C4_5.1 C4_5.2 C4_6.1 C4_6.2 C5.1 C5.2 C5_1.1 C5_1.2 C5_2.1 C5_2.2 C5_3.1 C5_3.2 C5_4.1 C5_4.2 C5_5.1 C5_5.2 C5_6.1 C5_6.2 C6.1 C6.2 C6_1.1 C6_1.2 C6_2.1 C6_2.2 C6_3.1 C6_3.2 C6_4.1 C6_4.2 C6_5.1 C6_5.2 C6_6.1 C6_6.2 C7.1 C7.2 C7_1.1 C7_1.2 C7_2.1 C7_2.2 C7_3.1 C7_3.2 C7_4.1 C7_4.2 C7_5.1 C7_5.2 C7_6.1 C7_6.2 C8.1 C8.2 C8_1.1 C8_1.2 C8_2.1 C8_2.2 C9.1 C9.2 C9_1.1 C9_1.2 C9_2.1 C9_2.2 C10.1 C10.2 C10_1.1 C10_1.2 C41.1 C41.2 C41_1.1 C41_1.2 C41_2.1 C41_2.2 C51.0 C51.1 C51.2 C51_1.0 C51_1.1 C51_1.2 C51_2.0 C51_2.1 C51_2.2 C81.0 C81.1 C81.2 C81_1.0 C81_1.1 C81_1.2 C81_2.0 C81_2.1 C81_2.2 C91.0 C91.1 C91.2 C91_1.1 C91_1.2 C91_2.0 C91_2.1 C91_2.2 C101.0 C101.1 C101.2 C101_1.0 C101_1.1 C101_1.2 C101_2.0 C101_2.1 C101_2.2 C111.1 C111.2 C111_1.0 C111_1.1 C111_1.2 C111_2.1 C111_2.2 C121.0 C121.1 C121.2 C121_1.0 C121_1.1 C121_1.2 C121_2.0 C121_2.1 C121_2.2 C122.0 C122.1 C122.2 C122_1.0 C122_1.1 C122_1.2 C122_2.0 C122_2.1 C122_2.2 C122B.0 C122B.1 C122B.2 C122B_1.0 C122B_1.1 C122B_1.2 C122B_2.0 C122B_2.1 C122B_2.2 C122C.0 C122C.1 C122C.2 C122C_1.0 C122C_1.1 C122C_1.2 C122C_2.0 C122C_2.1 C122C_2.2 C123.0 C123.1 C123.2 C123_1.0 C123_1.1 C123_1.2 C123_2.0 C123_2.1 C123_2.2 C124.0 C124.1 C124.2 C124_1.0 C124_1.1 C124_1.2 C124_2.0 C124_2.1 C124_2.2 C125.0 C125.1 C125.2 C125_1.0 C125_1.1 C125_1.2 C125_2.0 C125_2.1 C125_2.2 C131.0 C131.1 C131.2 C131_1.0 C131_1.1 C131_1.2 C131_2.0 C131_2.1 C131_2.2 C141.1 C141.2 C141_1.1 C141_1.2 C141_2.1 C141_2.2 C151.1 C151.2 C151_1.1 C151_1.2 C151_2.1 C151_2.2 C181.1 C181.2 C181_1.1 C181_1.2 C181_2.1 C181_2.2 CON1.1 CON1.2 CON2.1 CON2.2 D1.1 D1.2 D1_1.1 D1_1.2 D2.1 D2.2 D2_1.1 D2_1.2 H1.1 H1.2 H1_1.1 H1_1.2 HD1.1 HD1.2 HD1.3 HD1.4 HD1.5 HD1.6 HD1.7 HD1.8 HD1.9 HD1.10 HD1_1.1 HD1_1.2 HD1_1.3 HD1_1.4 HD1_1.5 HD1_1.6 HD1_1.7 HD1_1.8 HD1_1.9 HD1_1.10 HD1_2.1 HD1_2.2 HD1_2.3 HD1_2.4 HD1_2.5 HD1_2.6 HD1_2.7 HD1_2.8 HD1_2.9 HD1_2.10 HD1_3.1 HD1_3.2 HD1_3.3 HD1_3.4 HD1_3.5 HD1_3.6 HD1_3.7 HD1_3.8 HD1_3.9 HD1_3.10 IC1.1 IC1.2 IC1.3 IC1.4 IC1_1.1 IC1_1.2 IC1_1.3 IC1_1.4 IC1_2.1 IC1_2.2 IC1_2.3 IC1_2.4 IC1_3.1 IC1_3.2 IC1_3.3 IC1_3.4 IC1_4.1 IC1_4.2 IC1_4.3 IC1_4.4 IC1_5.1 IC1_5.2 IC1_5.3 IC1_5.4 ISP.1 ISP.2 ISP.3 ISP.4 ISP.5 ISP_1.1 ISP_1.2 ISP_1.3 ISP_1.4 ISP_1.5 ISP_2.1 ISP_2.2 ISP_2.3 ISP_2.4 ISP_2.5 ISP_3.1 ISP_3.2 ISP_3.3 ISP_3.4 ISP_3.5 JP2.1 JP2.2 JP2.3 JP2.4 JP2_1.1 JP2_1.2 JP2_1.3 JP2_1.4 JP3.1 JP3.2 JP3.3 JP3.4 JP3_1.1 JP3_1.2 JP3_1.3 JP3_1.4 JP?.1 JP?.2 JP?.3 JP?.4 JP?.5 JP?_1.1 JP?_1.2 JP?_1.3 JP?_1.4 JP?_1.5 L121.1 L121.2 L121_1.1 L121_1.2 L121_2.1 L121_2.2 L122.1 L122.2 L122_1.1 L122_1.2 L122_2.1 L122_2.2 L123.1 L123.2 L123_1.1 L123_1.2 L123_2.1 L123_2.2 L131.1 L131.2 L131_1.1 L131_1.2 L131_2.1 L131_2.2 LCD1.1 LCD1.2 LCD1.3 LCD1.4 LCD1.5 LCD1.6 LCD1.7 LCD1.8 LCD1.9 LCD1.10 LCD1.11 LCD1.12 LCD1.13 LCD1.14 LCD1.15 LCD1.16 LCD1_1.1 LCD1_1.2 LCD1_1.3 LCD1_1.4 LCD1_1.5 LCD1_1.6 LCD1_1.7 LCD1_1.8 LCD1_1.9 LCD1_1.10 LCD1_1.11 LCD1_1.12 LCD1_1.13 LCD1_1.14 LCD1_1.15 LCD1_1.16 LED1.1 LED1.2 LED1_1.1 LED1_1.2 LED1_2.1 LED1_2.2 LED1_3.1 LED1_3.2 LED1_4.1 LED1_4.2 LED1_5.1 LED1_5.2 LED2.1 LED2.2 LED2_1.1 LED2_1.2 LED2_2.1 LED2_2.2 LED2_3.1 LED2_3.2 LED2_4.1 LED2_4.2 LED2_5.1 LED2_5.2 LED3.1 LED3.2 LED3_1.1 LED3_1.2 NAPCODE.1 NAPCODE.2 NAPCODE.3 NAPCODE.4 NAPCODE.5 NGUON.1 NGUON.2 NGUON_1.1 NGUON_1.2 NGUON_2.1 NGUON_2.2 P1.1 P1.2 P1.3 P1.4 P1.5 P1.6 P1.7 P1.8 P1.9 P1.10 P1_1.1 P1_1.2 P1_1.3 P1_1.4 P1_1.5 P1_1.6 P1_1.7 P1_1.8 P1_1.9 P1_1.10 R1.1 R1.2 R1_1.1 R1_1.2 R1_2.1 R1_2.2 R1_3.1 R1_3.2 R1_4.1 R1_4.2 R1_5.1 R1_5.2 R1_6.1 R1_6.2 R2.1 R2.2 R2_1.1 R2_1.2 R2_2.1 R2_2.2 R2_3.1 R2_3.2 R2_4.1 R2_4.2 R2_5.1 R2_5.2 R2_6.1 R2_6.2 R3.1 R3.2 R3_1.1 R3_1.2 R3_2.1 R3_2.2 R3_3.1 R3_3.2 R3_4.1 R3_4.2 R3_5.1 R3_5.2 R3_6.1 R3_6.2 R4.1 R4.2 R4_1.1 R4_1.2 R4_2.1 R4_2.2 R4_3.1 R4_3.2 R4_4.1 R4_4.2 R4_5.1 R4_5.2 R5.1 R5.2 R5_1.1 R5_1.2 R6.1 R6.2 R7.1 R7.2 R171.1 R171.2 R171_1.1 R171_1.2 R171_2.1 R171_2.2 RF315.1 RF315.2 RF315.3 RF315.4 RF315.5 RF315.6 RF315.7 RF315.8 RF315.9 RF315.10 RF315_1.1 RF315_1.2 RF315_1.3 RF315_1.4 RF315_1.5 RF315_1.6 RF315_1.7 RF315_1.8 RF315_1.9 RF315_1.10 U1.1 U1.2 U1.3 U1.4 U1.5 U1.6 U1.7 U1.8 U1.9 U1.10 U1.11 U1.12 U1.13 U1.14 U1.15 U1.16 U1.17 U1.18 U1.19 U1.20 U1.21 U1_1.1 U1_1.2 U1_1.3 U1_1.4 U1_1.5 U1_1.6 U1_1.7 U1_1.8 U1_1.9 U1_1.10 U1_1.11 U1_1.12 U1_1.13 U1_1.14 U1_1.15 U1_1.16 U1_1.17 U1_1.18 U1_1.19 U1_1.20 U1_1.21 U1_1.22 U1_1.23 U1_1.24 U1_1.25 U1_1.26 U1_1.27 U1_1.28 U1_1.29 U1_1.30 U1_1.31 U1_1.32 U1_1.33 U1_1.34 U1_1.35 U1_1.36 U1_1.37 U1_1.38 U1_1.39 U1_1.40 U1_1.41 U1_1.42 U1_1.43 U1_1.44 U1_2.1 U1_2.2 U1_2.3 U1_2.4 U1_2.5 U1_2.6 U1_2.7 U1_2.8 U1_2.9 U1_2.10 U1_2.11 U1_2.12 U1_2.13 U1_2.14 U1_2.15 U1_2.16 U1_2.17 U1_2.18 U1_2.19 U1_2.20 U1_2.21 U1_3.1 U1_3.2 U1_3.3 U1_3.4 U1_3.5 U1_3.6 U1_3.7 U1_3.8 U1_3.9 U1_3.10 U1_3.11 U1_3.12 U1_3.13 U1_3.14 U1_3.15 U1_3.16 U1_3.17 U1_3.18 U1_3.19 U1_3.20 U1_3.21 U1_3.22 U1_3.23 U1_3.24 U1_3.25 U1_3.26 U1_3.27 U1_3.28 U1_3.29 U1_3.30 U1_3.31 U1_3.32 U1_3.33 U1_3.34 U1_3.35 U1_3.36 U1_3.37 U1_3.38 U1_3.39 U1_3.40 U1_3.41 U1_3.42 U1_3.43 U1_3.44 U1_4.1 U1_4.2 U1_4.3 U1_4.4 U1_4.5 U1_4.6 U1_4.7 U1_4.8 U1_4.9 U1_4.10 U1_4.11 U1_4.12 U1_4.13 U1_4.14 U1_4.15 U1_4.16 U1_4.17 U1_4.18 U1_4.19 U1_4.20 U1_5.1 U1_5.2 U1_5.3 U1_5.4 U1_5.5 U1_5.6 U1_5.7 U1_5.8 U1_5.9 U1_5.10 U1_5.11 U1_5.12 U1_5.13 U1_5.14 U1_5.15 U1_5.16 U1_5.17 U1_5.18 U1_5.19 U1_5.20 U1_5.21 U1_5.22 U1_5.23 U1_5.24 U1_5.25 U1_5.26 U1_5.27 U1_5.28 U1_5.29 U1_5.30 U1_5.31 U1_5.32 U1_5.33 U1_5.34 U1_5.35 U1_5.36 U1_5.37 U1_5.38 U1_5.39 U1_5.40 U1_5.41 U1_5.42 U1_5.43 U1_5.44 U1_5.45 U1_5.46 U1_5.47 U1_5.48 U1_5.49 U1_5.50 U1_5.51 U1_5.52 U1_5.53 U1_5.54 U1_5.55 U1_5.56 U1_5.57 U1_5.58 U1_5.59 U1_5.60 U1_5.61 U1_5.62 U1_5.63 U1_5.64 U1_6.1 U1_6.2 U1_6.3 U1_6.4 U1_6.5 U1_6.6 U1_6.7 U1_6.8 U1_6.9 U1_6.10 U1_6.11 U1_6.12 U1_6.13 U1_6.14 U1_6.15 U1_6.16 U1_6.17 U1_6.18 U1_6.19 U1_6.20 U1_6.21 U1_7.1 U1_7.2 U1_7.3 U1_7.4 U1_7.5 U1_7.6 U1_7.7 U1_7.8 U1_7.9 U1_7.10 U1_7.11 U1_7.12 U1_7.13 U1_7.14 U1_7.15 U1_7.16 U1_7.17 U1_7.18 U1_7.19 U1_7.20 U1_7.21 U1_7.22 U1_7.23 U1_7.24 U1_7.25 U1_7.26 U1_7.27 U1_7.28 U1_7.29 U1_7.30 U1_7.31 U1_7.32 U1_7.33 U1_7.34 U1_7.35 U1_7.36 U1_7.37 U1_7.38 U1_7.39 U1_7.40 U1_7.41 U1_7.42 U1_7.43 U1_7.44 U1_7.45 U1_7.46 U1_7.47 U1_7.48 U1_7.49 U1_7.50 U1_7.51 U1_7.52 U1_7.53 U1_7.54 U1_7.55 U1_7.56 U1_7.57 U1_7.58 U1_7.59 U1_7.60 U1_7.61 U1_7.62 U1_7.63 U1_7.64 U1_8.1 U1_8.2 U1_8.3 U1_8.4 U1_8.5 U1_8.6 U1_8.7 U1_8.8 U1_8.9 U1_8.10 U1_8.11 U1_8.12 U1_8.13 U1_8.14 U1_8.15 U1_8.16 U1_8.17 U1_8.18 U1_8.19 U1_8.20 U2.1 U2.2 U2.3 U2.4 U2_1.1 U2_1.2 U2_1.3 U2_1.4 U2_1.5 U2_1.6 U2_1.7 U2_1.8 U2_1.9 U2_1.10 U2_1.11 U2_1.12 U2_1.13 U2_1.14 U2_1.15 U2_1.16 U2_1.17 U2_1.18 U2_1.19 U2_1.20 U2_1.21 U2_1.22 U2_1.23 U2_1.24 U2_1.25 U2_1.26 U2_1.27 U2_1.28 U2_1.29 U2_1.30 U2_1.31 U2_1.32 U2_1.33 U2_1.34 U2_1.35 U2_1.36 U2_1.37 U2_1.38 U2_1.39 U2_1.40 U2_1.41 U2_1.42 U2_1.43 U2_1.44 U2_2.1 U2_2.2 U2_2.3 U2_2.4 UART.1 UART.2 UART.3 UART_1.1 UART_1.2 UART_1.3 USB1.1 USB1.2 USB1.3 USB1.4 USB1.5 USB1.6 VIN.1 VIN.2 VIN_1.1 VIN_1.2 VIN_2.1 VIN_2.2 VIN_3.1 VIN_3.2 VOL1.1 VOL1.2 VOL1.3 VOL1_1.1 VOL1_1.2 VOL1_1.3 VOUT.1 VOUT.2 VOUT_1.1 VOUT_1.2 VOUT_2.1 VOUT_2.2 VOUT_3.1 VOUT_3.2 X1.1 X1.2 X1_1.1 X1_1.2 X1_2.1 X1_2.2 X1_3.1 X1_3.2 X1_4.1 X1_4.2 X1_5.1 X1_5.2 X1_6.1 X1_6.2 X1_7.1 X1_7.2 X1_8.1 X1_8.2 X2.1 X2.2